# Altium PCB SCOPE.PcbDoc (part 1 of 4)
Units mil, origin at the board's own origin, x right, y up, seen from the top; angles counter-clockwise.
Board outline 7710 x 4000 mil, 2 copper layers (Top Layer, Bottom Layer); 219 components, 350 nets, 1637 pads, 359 vias.
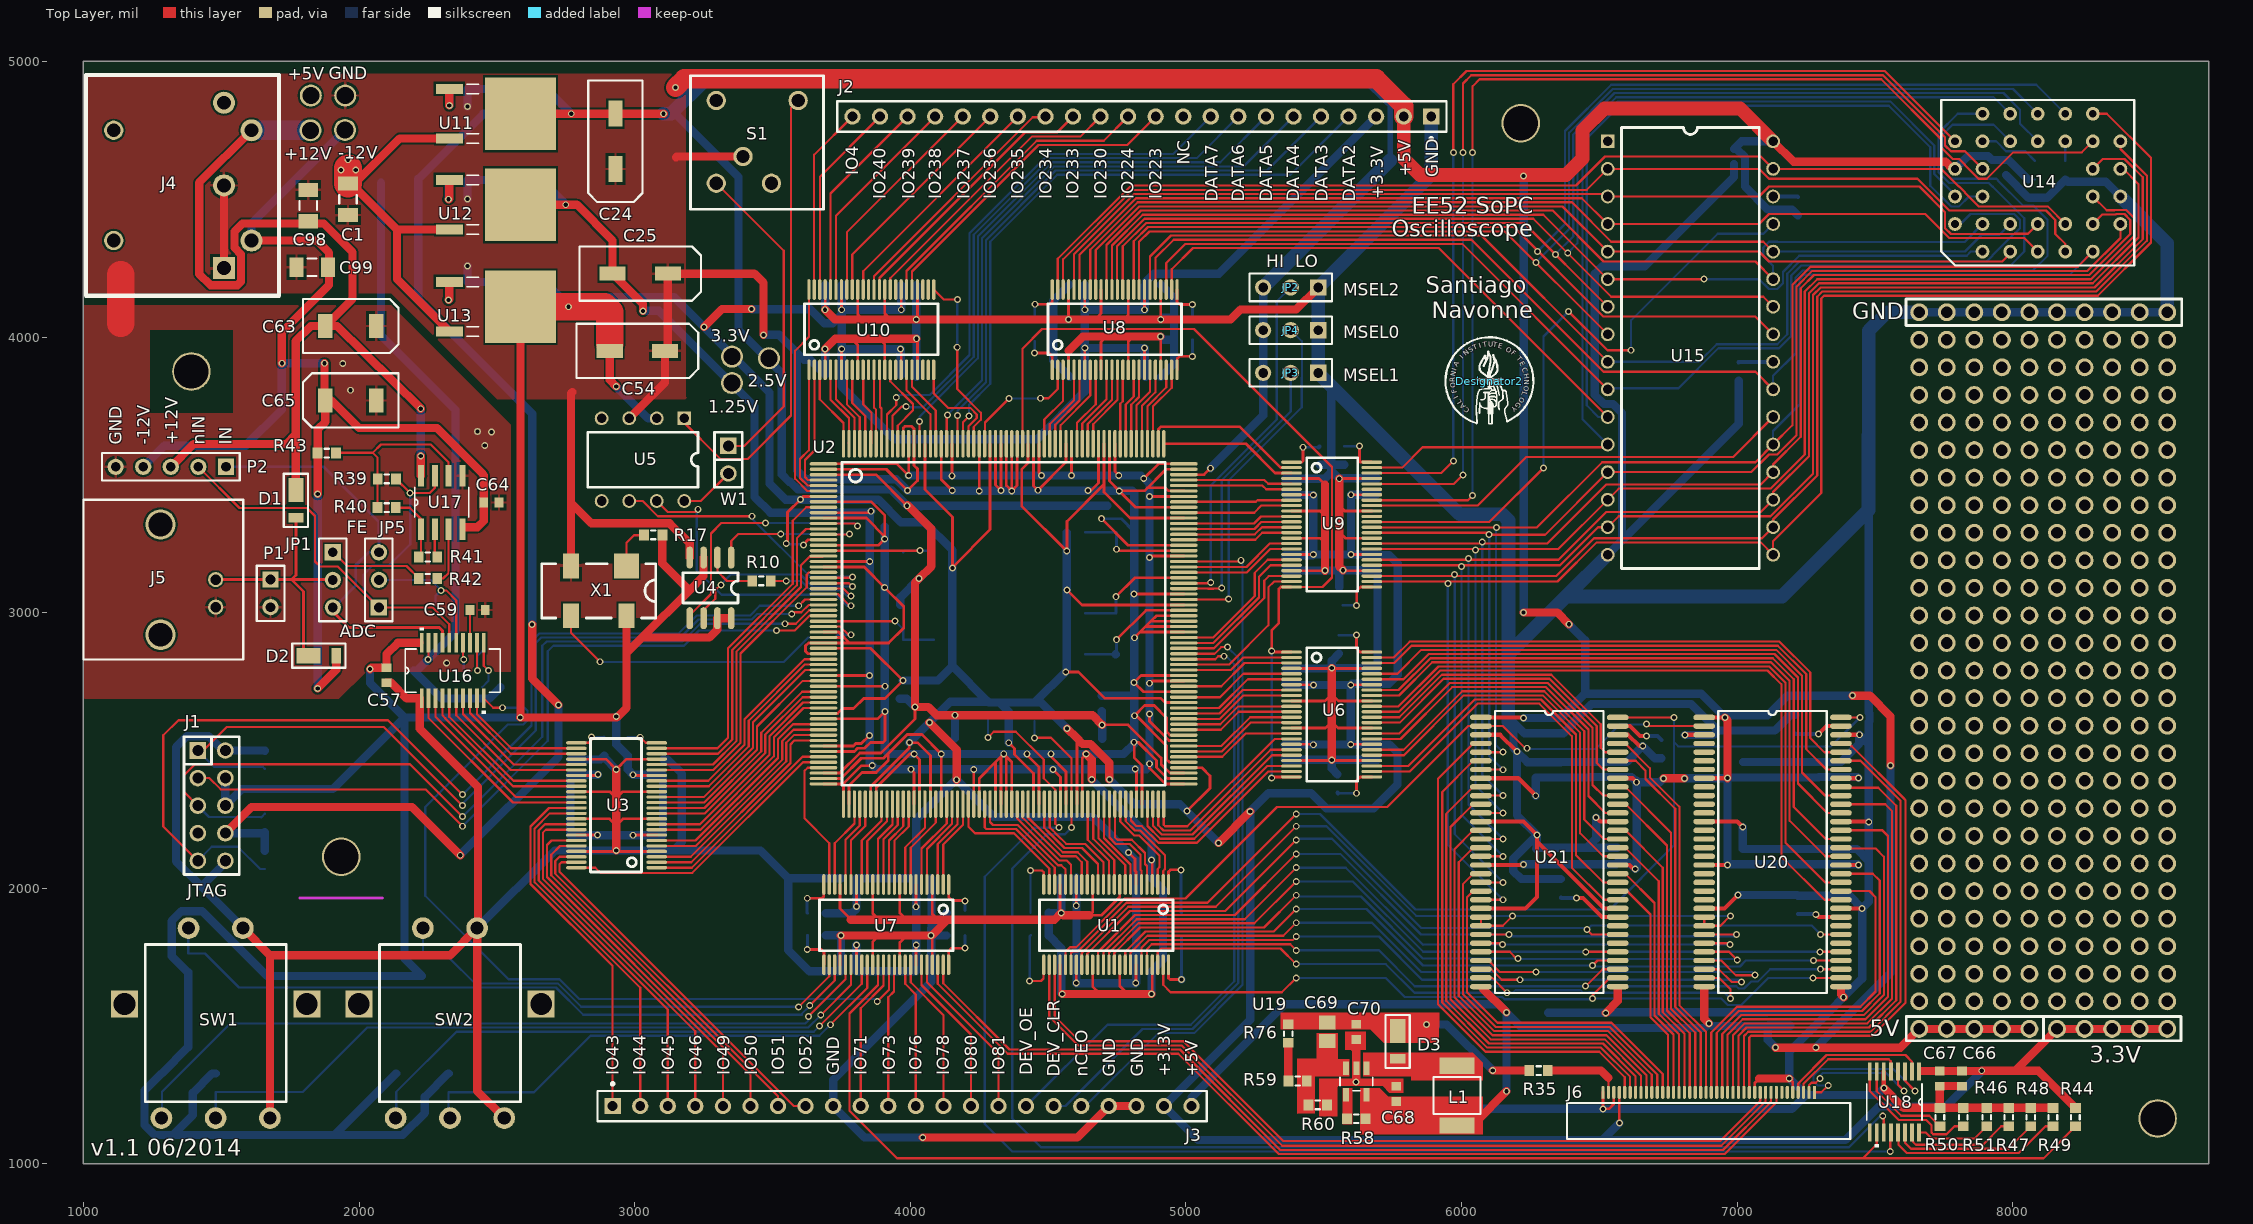
[diagram p0: Top Layer view]
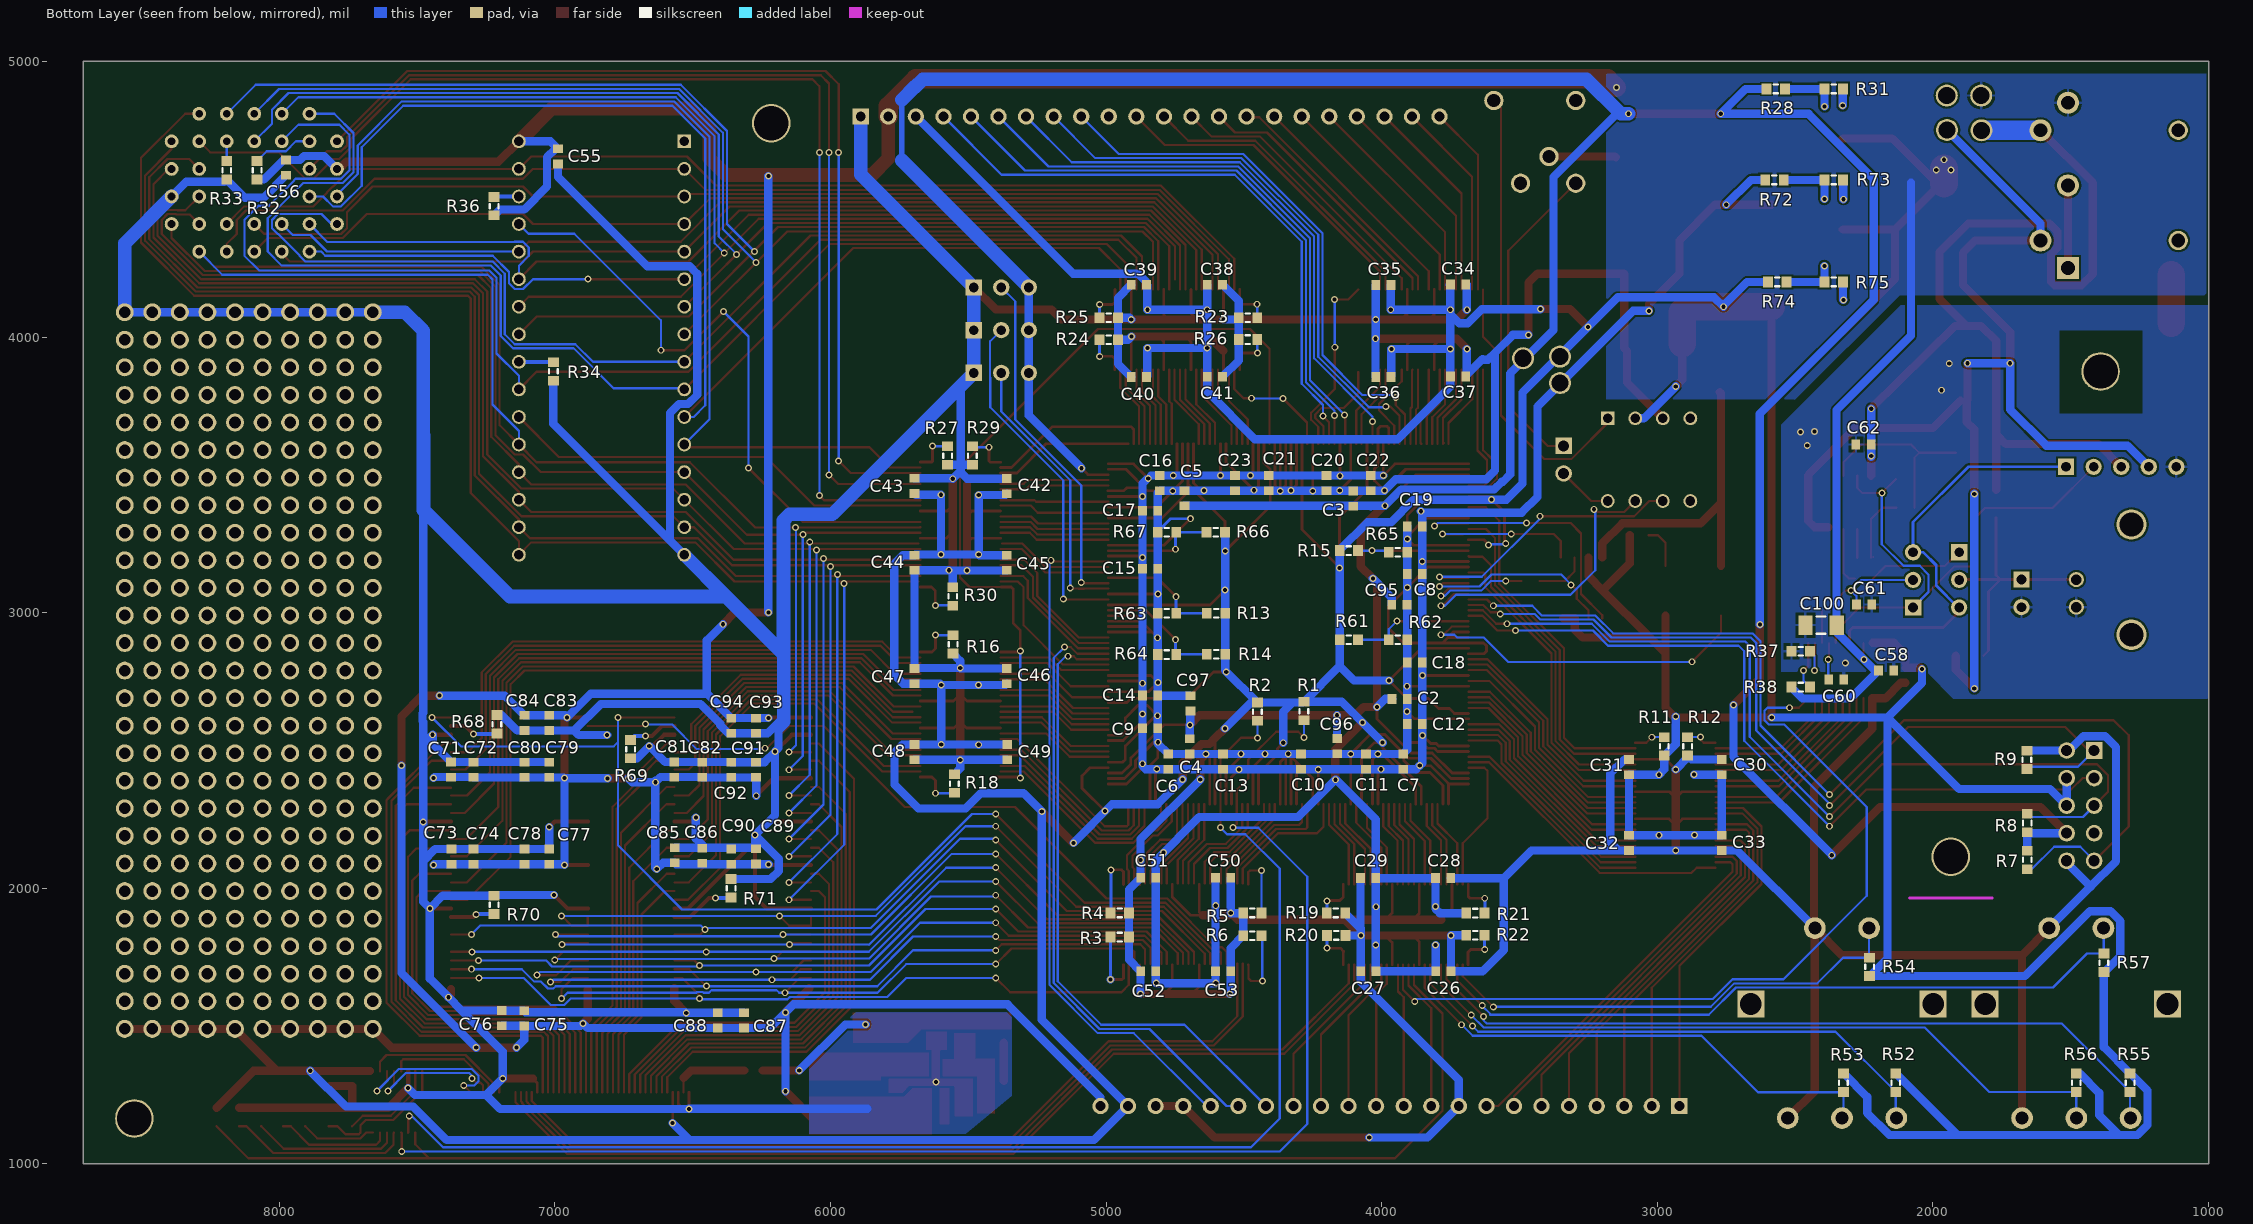
[diagram p1: Bottom Layer view, seen from below]

## Layer stack, top to bottom
Top Solder: solder mask 0.4, Solder Resist, Dk 3.5
Top Layer: signal copper 1.4
Dielectric 1: dielectric 12.6, FR-4, Dk 4.8
Bottom Layer: signal copper 1.4
Bottom Solder: solder mask 0.4, Solder Resist, Dk 3.5

## Board outline
1000,1000 8710,1000 8710,5000 1000,5000

## Design rules (kind name [scope] priority, off if disabled: settings)
Clearance [All] p1: gap=7
ComponentClearance [All] p1: gap=40 collisioncheckmode=3 verticalgap=0 showdistances=FALSE
HoleSize [All] p1: absolutevalues=TRUE maxlimit=150 minlimit=15 maxpercent=80.000 minpercent=20.000
MinimumAnnularRing [All] p1: minimumring=5
MinimumSolderMaskSliver [All] p1: minsoldermaskwidth=5
PolygonConnect polyvia [IsVia] p1: connectstyle=Direct reliefconductorwidth=10 reliefentries=4 polygonreliefangle="90 Angle" airgapwidth=10
PolygonConnect [All] p2: connectstyle=Relief reliefconductorwidth=10 reliefentries=4 polygonreliefangle="90 Angle" airgapwidth=10
RoutingVias [All] p1: holewidth=15 width=25 viastyle="Through Hole" minholewidth=15 minwidth=25 maxholewidth=15 maxwidth=25
SilkToSilkClearance [All] p1: silktosilkclearance=5
SilkToSolderMaskClearance [IsPad] p1: minsilkscreentomaskgap=5 clearancetoexposedcopper=TRUE
SolderMaskExpansion [All] p1: expansion=2.5
Width power [(InNet('PIN0') OR InNet('PIN3') OR InNet('PIN1') OR InNet('VCCINT'))] p1 off: maxlimit=100 minlimit=30 preferedwidth=30
Width [All] p2: maxlimit=100 minlimit=7 preferedwidth=10 minimp=50.000000 maximp=50.000000 favimp=50.000000
24 further rules are at their usual default settings.

## Classes and differential pairs
component class user_input: C66 C67 R44 R46 R47 R48 R49 R50 R51 R52 R53 R54 R55 R56 R57 SW1 SW2 U18
component class analog_frontend: C57 C58 C59 C60 C61 C62 C63 C64 C65 C100 D1 D2 J5 JP1 JP5 P1 P2 R37 R38 R39 R40 R41 R42 R43 U16 U17
component class sram_rom: C55 C56 R32 R33 R34 R36 U14 U15
component class fpga_sch: C1 C2 C3 C4 C5 C6 C7 C8 C9 C10 C11 C12 C13 C14 C15 C16 C17 C18 C19 C20 C21 C22 C23 C24 C25 C26 C27 C28 C29 C30 C31 C32 C33 C34 C35 C36 C37 C38 C39 C40 C41 C42 C43 C44 C45 C46 C47 C48 C49 C50 C51 C52 C53 C54 C95 C96 C97 C98 C99 J1 J2 J3 J4 JP2 JP3 JP4 R2 R3 R4 R5 R6 R7 R8 R9 R10 R11 R12 R13 R14 R15 R16 R17 R18 R19 R20 R21 R22 R23 R24 R25 R26 R27 R28 R29 R30 R31 R61 R62 R63 R64 R65 R66 R67 R72 R73 R74 R75 S1 U1 U2 U3 U4 U5 U6 U7 U8 U9 U10 U11 U12 U13 W1 X1
component class vram: C68 C69 C70 C71 C72 C73 C74 C75 C76 C77 C78 C79 C80 C81 C82 C83 C84 C85 C86 C87 C88 C89 C90 C91 C92 C93 C94 D3 J6 L1 R35 R58 R59 R60 R68 R69 R70 R71 R76 U19 U20 U21

## Components (designator, comment, footprint, x,y, rotation, side; value= is the part's Value field where it differs from the comment)
C1 "Cap Pol1" CAPC3216N 1960,4500 r270 top
C2 "Cap2" CAPC1608L#1 3935,2687 r180 bottom
C3 "Cap2" CAPC1608L#2 4103,3414 r270 bottom
C4 "Cap2" CAPC1608L#1 4696,2515 r270 bottom
C5 "Cap2" CAPC1608L#1 4715,3415 r90 bottom
C6 "Cap2" CAPC1608L#1 4774,2460 r90 bottom
C7 "Cap2" CAPC1608L#1 3922,2460 r90 bottom
C8 "Cap2" CAPC1608L#1 3880,3140 r0 bottom
C9 "Cap2" CAPC1608L#1 4840,2581 r180 bottom
C10 "Cap2" CAPC1608L#1 4293,2460 r90 bottom
C11 "Cap2" CAPC1608L#1 4057,2460 r90 bottom
C12 "Cap2" CAPC1608L#1 3880,2596 r0 bottom
C13 "Cap2" CAPC1608L#1 4576,2460 r90 bottom
C14 "Cap2" CAPC1608L#1 4840,2700 r180 bottom
C15 "Cap2" CAPC1608L#1 4840,3159 r180 bottom
C16 "Cap2" CAPC1608L#1 4805,3470 r270 bottom
C17 "Cap2" CAPC1608L#1 4840,3370 r180 bottom
C18 "Cap2" CAPC1608L#1 3880,2819 r0 bottom
C19 "Cap2" CAPC1608L#1 3880,3313 r0 bottom
C20 "Cap2" CAPC1608L#1 4200,3470 r270 bottom
C21 "Cap2" CAPC1608L#2 4410,3470 r90 bottom
C22 "Cap2" CAPC1608L#1 4040,3470 r270 bottom
C23 "Cap2" CAPC1608L#1 4532,3470 r270 bottom
C24 "Cap Pol3" C2917 2930,4710 r270 top
C25 "Cap Pol3" C2917 3020,4230 r0 top
C26 "Cap2" CAPC1608L#2 3776,1699 r0 bottom
C27 "Cap2" CAPC1608L#1 4048,1699 r0 bottom
C28 "Cap2" CAPC1608L#1 3777,2037 r180 bottom
C29 "Cap2" CAPC1608L#1 4049,2037 r0 bottom
C30 "Cap2" CAPC1608L#1 2766,2440 r90 bottom
C31 "Cap2" CAPC1608L#1 3103,2440 r90 bottom
C32 "Cap2" CAPC1608L#1 3103,2165 r270 bottom
C33 "Cap2" CAPC1608L#1 2766,2165 r270 bottom
C34 "Cap2" CAPC1608L#1 3723,4191 r180 bottom
C35 "Cap2" CAPC1608L#1 3994,4189 r0 bottom
C36 "Cap2" CAPC1608L#1 3994,3855 r0 bottom
C37 "Cap2" CAPC1608L#1 3723,3857 r180 bottom
C38 "Cap2" CAPC1608L#1 4605,4190 r180 bottom
C39 "Cap2" CAPC1608L#1 4881,4190 r0 bottom
C40 "Cap2" CAPC1608L#1 4881,3855 r0 bottom
C41 "Cap2" CAPC1608L#1 4605,3856 r180 bottom
C42 "Cap2" CAPC1608L#1 5360,3459 r90 bottom
C43 "Cap2" CAPC1608L#1 5695,3460 r90 bottom
C44 "Cap2" CAPC1608L#1 5695,3181 r270 bottom
C45 "Cap2" CAPC1608L#1 5360,3181 r270 bottom
C46 "Cap2" CAPC1608L#1 5360,2770 r90 bottom
C47 "Cap2" CAPC1608L#1 5695,2770 r90 bottom
C48 "Cap2" CAPC1608L#1 5695,2494 r270 bottom
C49 "Cap2" CAPC1608L#1 5358,2494 r270 bottom
C50 "Cap2" CAPC1608L#1 4575,2038 r180 bottom
C51 "Cap2" CAPC1608L#1 4847,2038 r0 bottom
C52 "Cap2" CAPC1608L#1 4847,1699 r0 bottom
C53 "Cap2" CAPC1608L#1 4575,1699 r180 bottom
C54 "Cap Pol3" C2917 3010,3950 r0 top
C55 "Cap2" CAPC1608L#1 6988,4655 r270 bottom
C56 "Cap2" CAPC1608L#1 7975,4615 r270 bottom
C57 "Cap2" CAPC1608L#1 2100,2773 r270 top
C58 "Cap2" CAPC1608L#1 2170,2790 r180 bottom
C59 "Cap2" CAPC1608L#1 2430,3010 r0 top
C60 "Cap2" CAPC1608L#1 2351,2758 r180 bottom
C61 "Cap2" CAPC1608L#1 2250,3030 r180 bottom
C62 "Cap2" CAPC1608L#1 2252,3610 r0 bottom
C63 "Cap Pol3" C2413 1970,4040 r0 top
C64 "Cap2" CAPC1608L#1 2480,3400 r180 top
C65 "Cap Pol3" C2413 1970,3770 r180 top
C66 "Cap2" CAPC1608L#1 7815,1310 r270 top
C67 "Cap2" CAPC1608L#1 7735,1310 r270 top
C68 "Cap2" CAPC1608L#1 5763,1254 r90 top
C69 "Cap2" CAPC2012N 5513,1480 r90 top
C70 "Cap2" CAPC1608L#1 5618,1479 r270 top
C71 "Cap2" CAPC1608L#1 7376.06,2431.02 r90 bottom
C72 "Cap2" CAPC1608L#1 7295,2430 r90 bottom
C73 "Cap2" CAPC1608L#1 7375,2115 r90 bottom
C74 "Cap2" CAPC1608L#1 7295,2115 r90 bottom
C75 "Cap2" CAPC1608L#1 7111,1528 r90 bottom
C76 "Cap2" CAPC1608L#1 7192,1529 r90 bottom
C77 "Cap2" CAPC1608L#1 7020,2115 r90 bottom
C78 "Cap2" CAPC1608L#1 7110,2115 r90 bottom
C79 "Cap2" CAPC1608L#1 7020,2430 r90 bottom
C80 "Cap2" CAPC1608L#1 7110,2430 r90 bottom
C81 "Cap2" CAPC1608L#1 6566.06,2431.02 r90 bottom
C82 "Cap2" CAPC1608L#1 6465,2430 r90 bottom
C83 "Cap2" CAPC1608L#1 7020,2600 r270 bottom
C84 "Cap2" CAPC1608L#1 7110,2600 r270 bottom
C85 "Cap2" CAPC1608L#1 6565,2120 r90 bottom
C86 "Cap2" CAPC1608L#1 6465,2118 r90 bottom
C87 "Cap2" CAPC1608L#1 6313,1521 r90 bottom
C88 "Cap2" CAPC1608L#1 6409,1521 r90 bottom
C89 "Cap2" CAPC1608L#1 6270,2116 r90 bottom
C90 "Cap2" CAPC1608L#1 6360,2115 r90 bottom
C91 "Cap2" CAPC1608L#1 6270,2430 r90 bottom
C92 "Cap2" CAPC1608L#1 6360,2430 r90 bottom
C93 "Cap2" CAPC1608L#1 6270,2590 r270 bottom
C94 "Cap2" CAPC1608L#1 6360,2590 r270 bottom
C95 "Cap2" CAPC1608L#1 3936,3029 r180 bottom
C96 "Cap2" CAPC1608L#1 4161,2516 r270 bottom
C97 "Cap2" CAPC1608L#1 4694,2671 r90 bottom
C98 "Cap Pol1" CAPC3216N 1816,4477 r90 top
C99 "Cap Pol1" CAPC3216N 1830,4253 r0 top
C100 "Cap Pol3" CAPC3216N 2406,2955 r0 bottom
D1 "D Schottky" POWERDI123 1771,3395 r90 top
D2 "D Schottky" POWERDI123 1867,2844 r180 top
D3 "D Schottky" POWERDI123 5768,1432 r90 top
Designator2 "Comment" CITLOGO 6101,3840 r0 top
J1 "JTAG" SIP2X5 1415,2500 r270 top
J2 "Edge Con 22" PIN22 5890,4800 r180 top
J3 "Edge Con 22" PIN22 2920,1210 r0 top
J4 "PS_CONN" DIN5 1710,4150 r180 top
J5 "BNC" AMP31-5540 1480,3120 r270 top
J6 "A100287CT" FPC40 7280,1260 r270 top
JP1 "AIN" HDR1X3 1905,3219 r270 top
JP2 "MSEL2" HDR1X3 5480,4180 r180 top
JP3 "MSEL1" HDR1X3 5480,3870 r180 top
JP4 "MSEL0" HDR1X3 5480,4025 r180 top
JP5 "AIN" HDR1X3 2072,3019 r90 top
L1 "Inductor" lsdr0703 5983,1248 r90 top
P1 "Header 2" HDR1X2 1679,3120 r270 top
P2 "Header 5" HDR1X5 1517,3529 r180 top
R1 "Res3" RESC1608N 4282,2643 r270 bottom
R2 "Res3" RESC1608N 4451,2641 r270 bottom
R3 "Res3" RESC1608N 4950,1911 r180 bottom
R4 "Res3" RESC1608N 4950,1823 r180 bottom
R5 "Res3" RESC1608N 4469,1911 r0 bottom
R6 "Res3" RESC1608N 4469,1828 r0 bottom
R7 "Res3" RESC1608N 1658,2103 r270 bottom
R8 "Res3" RESC1608N 1658,2237 r90 bottom
R9 "Res3" RESC1608N 1659,2466 r270 bottom
R10 "Res3" RESC1608N 3460,3115 r0 top
R11 "Res3" RESC1608N 2975,2515 r270 bottom
R12 "Res3" RESC1608N 2890,2515 r270 bottom
R13 "Res3" RESC1608N 4601,2998 r0 bottom
R14 "Res3" RESC1608N 4601,2849 r0 bottom
R15 "Res3" RESC1608N 4119,3225 r180 bottom
R16 "Res3" RESC1608N 5555,2885 r90 bottom
R17 "Res3" RESC1608N 3067,3282 r0 top
R18 "Res3" RESC1608N 5550,2380 r270 bottom
R19 "Res3" RESC1608N 4166,1911 r180 bottom
R20 "Res3" RESC1608N 4165,1829 r180 bottom
R21 "Res3" RESC1608N 3660,1910 r0 bottom
R22 "Res3" RESC1608N 3660,1830 r0 bottom
R23 "Res3" RESC1608N 4485,4070 r0 bottom
R24 "Res3" RESC1608N 4990,3990 r180 bottom
R25 "Res3" RESC1608N 4990,4070 r180 bottom
R26 "Res3" RESC1608N 4485,3991 r0 bottom
R27 "Res3" RESC1608N 5575,3570 r270 bottom
R28 "Res3" RESC1608N 2570,4900 r180 bottom
R29 "Res3" RESC1608N 5485,3570 r270 bottom
R30 "Res3" RESC1608N 5556,3059 r90 bottom
R31 "Res3" RESC1608N 2360,4900 r180 bottom
R32 "Res3" RESC1608N 8080,4605 r90 bottom
R33 "Res3" RESC1608N 8190,4605 r90 bottom
R34 "Res3" RESC1608N 7005,3875 r90 bottom
R35 "Res3" RESC1608N 6279,1339 r180 top
R36 "Res3" RESC1608N 7220,4475 r90 bottom
R37 "Res3" RESC1608N 2480,2860 r180 bottom
R38 "Res3" RESC1608N 2480,2730 r180 bottom
R39 "Res3" RESC1608N 2101,3485 r0 top
R40 "Res3" RESC1608N 2100,3381 r0 top
R41 "Res3" RESC1608N 2250,3202 r0 top
R42 "Res3" RESC1608N 2250,3124 r180 top
R43 "Res3" RESC1608N 1883,3579 r0 top
R44 "Res3" RESC1608N 8227,1170 r270 top
R46 "Res3" RESC1608N 7905,1170 r270 top
R47 "Res3" RESC1608N 7985,1170 r270 top
R48 "Res3" RESC1608N 8065,1170 r270 top
R49 "Res3" RESC1608N 8145,1170 r270 top
R50 "Res3" RESC1608N 7735,1170 r90 top
R51 "Res3" RESC1608N 7820,1170 r90 top
R52 "Res3" RESC1608N 2135,1295 r270 bottom
R53 "Res3" RESC1608N 2325,1295 r270 bottom
R54 "Res3" RESC1608N 2230,1715 r90 bottom
R55 "Res3" RESC1608N 1285,1295 r270 bottom
R56 "Res3" RESC1608N 1480,1295 r270 bottom
R57 "Res3" RESC1608N 1380,1730 r90 bottom
R58 "Res3" RESC1608N 5618,1164 r180 top
R59 "Res3" RESC1608N 5405,1301 r180 top
R60 "Res3" RESC1608N 5478,1214 r180 top
R61 "Res3" RESC1608N 4119,2902 r180 bottom
R62 "Res3" RESC1608N 3941,2902 r0 bottom
R63 "Res3" RESC1608N 4779,2998 r180 bottom
R64 "Res3" RESC1608N 4779,2848 r180 bottom
R65 "Res3" RESC1608N 3941,3219 r0 bottom
R66 "Res3" RESC1608N 4602,3292 r0 bottom
R67 "Res3" RESC1608N 4779,3292 r180 bottom
R68 "Res3" RESC1608N 7210,2595 r270 bottom
R69 "Res3" RESC1608N 6725,2505 r90 bottom
R70 "Res3" RESC1608N 7220,1940 r90 bottom
R71 "Res3" RESC1608N 6360,2000 r90 bottom
R72 "Res3" RESC1608N 2575,4570 r180 bottom
R73 "Res3" RESC1608N 2360,4570 r180 bottom
R74 "Res3" RESC1608N 2565,4200 r180 bottom
R75 "Res3" RESC1608N 2360,4200 r180 bottom
R76 "Res3" RESC1608N 5371,1473 r90 top
S1 "SW-SPDT" SPDT 3596,5645 r90 top
SW1 "SW-ROTARY&PB" PEC16-4XXXF-SXXXX 1480,1580 r0 top
SW2 "SW-ROTARY&PB" PEC16-4XXXF-SXXXX 2330,1580 r0 top
U1 "74LVT16245" TSSOP48 4937,2014 r180 top
U2 "EP3C25Q240" PQFP240 3685,3540 r0 top
U3 "74LVT16245" TSSOP48 3080,2075 r90 top
U4 "EPCS16" SO-8 3350,3200 r270 top
U5 "MAX706AS" DIP8 3180,3705 r270 top
U6 "74LVT16245" TSSOP48 5383,2857 r270 top
U7 "74LVT16245" TSSOP48 4139,2014 r180 top
U8 "74LVT16245" TSSOP48 4515,3881 r0 top
U9 "74LVT16245" TSSOP48 5383,3546 r270 top
U10 "74LVT16245" TSSOP48 3632,3881 r0 top
U11 "TLV1117-25" KVU3 2580,4810 r270 top
U12 "TLV1117-ADJ" KVU3 2580,4480 r270 top
U13 "TLV1117-33" KVU3 2580,4110 r270 top
U14 "AM29F040B" PLCCS32 7790,4210 r90 top
U15 "HM628128B" DIP32 6530,4710 r0 top
U16 "ADS830" DBQ20 2340,2790 r90 top
U17 "THS4042" D8 2300,3400 r90 top
U18 "TSC2003" PW16 7570,1225 r270 top
U19 "LMR62014" MF05A 5618,1299 r270 top
U20 "MSM5416283" SSOP64 6880,2620 r0 top
U21 "MSM5416283" SSOP64 6070,2620 r0 top
W1 "Jumper" SIP2 3340,3605 r270 top
X1 "OSCOE" SG636PCE 2970,3170 r180 top

## Footprints (in the part's own frame and the unit in brackets; to place one, negate y for a bottom-side part, rotate by r counter-clockwise, add the part's x,y. Pads: shape width x height; smd on the part's side, far side on the other; paste and mask are expansions set on the pad)
AMP31-5540 [mil]
  round 55 hole 38: 1(0,0) 2(100,0)
  round 110 hole 86: ""(-200,-200) ""(200,-200)
  silkscreen extent -290,-480 290,100
C2413 [mm]
  rect 1.3x2.2 smd: 1(-2.35,0) 2(2.35,0)
  silkscreen extent -4.4,-2.5 4.4,2.5
C2917 [mm]
  rect 2.4x1.3 smd: 1(-2.55,0) 2(2.55,0)
  silkscreen extent -5.6,-2.5 5.6,2.5
CAPC1608L#1 [mm] "Chip Capacitor, Body 1.6x0.8mm, IPC High Density"
  rect 0.8x0.9 smd: 1(-0.7,0) 2(0.7,0)
  body extent -0.87,-0.48 0.87,0.48, height 0.85
CAPC1608L#2 [mm] "Chip Capacitor, Body 1.6x0.8mm, IPC High Density"
  rect 0.8x0.9 smd: 1(0.7,0) 2(-0.7,0)
  body extent -0.87,-0.48 0.87,0.48, height 0.85
CAPC2012N [mm] "Chip Capacitor, Body 2.0x1.3mm, IPC Medium Density"
  rect 1.3x1.5 smd: 1(-0.85,0) 2(0.85,0)
  body extent -1.1,-0.72 1.1,0.72, height 1.1
CAPC3216N [mm] "Chip Capacitor, Body 3.2x1.6mm, IPC Medium Density"
  rect 1.3x1.8 smd: 1(-1.45,0) 2(1.45,0)
  silkscreen extent -0.4,-0.8 0.4,0.8, body extent -1.7,-0.9 1.7,0.9, height 1.35
CITLOGO [mil]
  silkscreen extent -159,-154 159,159
D8 [mil]
  rect 78x22 smd: 1(-97,75) 2(-97,25) 3(-97,-25) 4(-97,-75) 5(97,-75) 6(97,-25) 7(97,25) 8(97,75)
  silkscreen extent -54,-98 54,98
DBQ20 [mil]
  rect 71x14 smd: 1(-100.5,112.5) 2(-100.5,87.5) 3(-100.5,62.5) 4(-100.5,37.5) 5(-100.5,12.5) 6(-100.5,-12.5) 7(-100.5,-37.5) 8(-100.5,-62.5) 9(-100.5,-87.5) 10(-100.5,-112.5) 11(100.5,-112.5) 12(100.5,-87.5) 13(100.5,-62.5) 14(100.5,-37.5) 15(100.5,-12.5) 16(100.5,12.5) 17(100.5,37.5) 18(100.5,62.5) 19(100.5,87.5) 20(100.5,112.5)
  silkscreen extent -156,-172 156,172
DIN5 [mil]
  rect 80x80 hole 50: 1(200,-100)
  round 80 hole 50: 2(100,-200) 3(200,-400) 4(100,-600) 5(200,-700)
  round 70 hole 50: ""(600,-200) ""(600,-600)
  silkscreen extent 0,-800 700,0
DIP8 [mil]
  rect 50x50 hole 35: 1(0,0)
  round 50 hole 35: 2(0,-100) 3(0,-200) 4(0,-300) 5(300,-300) 6(300,-200) 7(300,-100) 8(300,0)
  silkscreen extent 50,-350 250,50
DIP32 [mil]
  rect 50x50 hole 35: 1(0,0)
  round 50 hole 35: 2(0,-100) 3(0,-200) 4(0,-300) 5(0,-400) 6(0,-500) 7(0,-600) 8(0,-700) 9(0,-800) 10(0,-900) 11(0,-1000) 12(0,-1100) 13(0,-1200) 14(0,-1300) 15(0,-1400) 16(0,-1500) 17(600,-1500) 18(600,-1400) 19(600,-1300) 20(600,-1200) 21(600,-1100) 22(600,-1000) 23(600,-900) 24(600,-800) 25(600,-700) 26(600,-600) 27(600,-500) 28(600,-400) 29(600,-300) 30(600,-200) 31(600,-100) 32(600,0)
  silkscreen extent 50,-1550 550,50
FPC40 [mm]
  oval 1.2x0.3 smd: 1(0,-19.482) 2(0,-18.982) 3(0,-18.482) 4(0,-17.982) 5(0,-17.482) 6(0,-16.982) 7(0,-16.482) 8(0,-15.982) 9(0,-15.482) 10(0,-14.982) 11(0,-14.482) 12(0,-13.982) 13(0,-13.482) 14(0,-12.982) 15(0,-12.482) 16(0,-11.982) 17(0,-11.482) 18(0,-10.982) 19(0,-10.482) 20(0,-9.982) 21(0,-9.5) 22(0,-9) 23(0,-8.5) 24(0,-8) 25(0,-7.5) 26(0,-7) 27(0,-6.5) 28(0,-6) 29(0,-5.5) 30(0,-5) 31(0,-4.5) 32(0,-4) 33(0,-3.5) 34(0,-3) 35(0,-2.5) 36(0,-2) 37(0,-1.5) 38(0,-1) 39(0,-0.5)
  rect 1.2x0.3 smd: 40(0,0)
  silkscreen extent 1,-22.8 4.3,3.3
HDR1X2 [mm] "Connector; Header; 2 Position"
  rect 1.5x1.5 hole 0.9: 1(0,0)
  round 1.5 hole 0.9: 2(2.54,0)
  silkscreen extent -1.27,-1.27 3.81,1.27
HDR1X3 [mm]
  rect 1.5x1.5 hole 0.9: 1(0,0)
  round 1.5 hole 0.9: 2(2.54,0) 3(5.08,0)
  silkscreen extent -1.27,-1.27 6.35,1.27
HDR1X5 [mm] "Connector; Header; 5 Position"
  rect 1.5x1.5 hole 0.9: 1(0,0)
  round 1.5 hole 0.9: 2(2.54,0) 3(5.08,0) 4(7.62,0) 5(10.16,0)
  silkscreen extent -1.27,-1.27 11.43,1.27
KVU3 [mil]
  rect 37x98 smd: 1(-90,-252.5) 3(90,-252.5)
  rect 264x257 smd: 2(0,6)
  silkscreen extent -107,-190 108,-146
lsdr0703 [mm]
  rect 1.5x3.2 smd: 1(-2.75,0) 2(2.75,0)
  silkscreen extent -1.7,-2.16 1.73,2.16
MF05A [mil]
  rect 50x22 smd: 1(-48,37.5) 2(-48,0) 3(-48,-37.5) 4(48,-37.5) 5(48,37.5)
  silkscreen extent -15,-59 33,59
PEC16-4XXXF-SXXXX [mm]
  round 2 hole 1.2: 1(-5,-10.5) 2(5,-10.5) 3(0,-10.5) 4(-2.5,7) 5(2.5,7)
  rect 2.5x2.5 hole 2: 6(-8.4,0) 7(8.4,0)
  silkscreen extent -6.5,-9 6.5,5.5
PIN22 [mm] "Connector; Edge; 22 Position"
  rect 1.5x1.5 hole 0.9: 1(0,0)
  round 1.5 hole 0.9: 2(2.54,0) 3(5.08,0) 4(7.62,0) 5(10.16,0) 6(12.7,0) 7(15.24,0) 8(17.78,0) 10(22.86,0) 11(25.4,0) 12(27.94,0) 13(30.48,0) 14(33.02,0) 15(35.56,0) 16(38.1,0) 17(40.64,0) 18(43.18,0) 19(45.72,0) 20(48.26,0) 21(50.8,0) 22(53.34,0)
  oval 1.51x1.5 hole 0.9: 9(20.32,0)
  silkscreen extent -1.4,-1.4 54.74,2.17
PLCCS32 [mil]
  round 50 hole 28: 1(400,-100) 2(300,0) 3(300,-100) 4(200,0) 5(100,-100) 6(200,-100) 7(100,-200) 8(200,-200) 9(100,-300) 10(200,-300) 11(100,-400) 12(200,-400) 13(100,-500) 14(200,-600) 15(200,-500) 16(300,-600) 17(300,-500) 18(400,-600) 19(400,-500) 20(500,-600) 21(600,-500) 22(500,-500) 23(600,-400) 24(500,-400) 25(600,-300) 26(500,-300) 27(600,-200) 28(500,-200) 29(600,-100) 30(500,0) 31(500,-100) 32(400,0)
  silkscreen extent 50,-650 650,50
POWERDI123 [mm]
  rect 0.9x1.4 smd: A(-1.275,0)
  rect 2.2x1.4 smd: K(1.275,0)
  silkscreen extent -2.13,-1.12 2.77,1.12
PQFP240 [mm]
  oval 2.54x0.3 smd: 1(0,0) 2(0,-0.5) 3(0,-1) 4(0,-1.5) 5(0,-2) 6(0,-2.5) 7(0,-3) 8(0,-3.5) 9(0,-4) 10(0,-4.5) 11(0,-5) 12(0,-5.5) 13(0,-6) 14(0,-6.5) 15(0,-7) 16(0,-7.5) 17(0,-8) 18(0,-8.5) 19(0,-9) 20(0,-9.5) 21(0,-10) 22(0,-10.5) 23(0,-11) 24(0,-11.5) 25(0,-12) 26(0,-12.5) 27(0,-13) 28(0,-13.5) 29(0,-14) 30(0,-14.5) 31(0,-15) 32(0,-15.5) 33(0,-16) 34(0,-16.5) 35(0,-17) 36(0,-17.5) 37(0,-18) 38(0,-18.5) 39(0,-19) 40(0,-19.5) 41(0,-20) 42(0,-20.5) 43(0,-21) 44(0,-21.5) 45(0,-22) 46(0,-22.5) 47(0,-23) 48(0,-23.5) 49(0,-24) 50(0,-24.5) 51(0,-25) 52(0,-25.5) 53(0,-26) 54(0,-26.5) 55(0,-27) 56(0,-27.5) 57(0,-28) 58(0,-28.5) 59(0,-29) 60(0,-29.5) 121(33.2,-29.5) 122(33.2,-29) 123(33.2,-28.5) 124(33.2,-28) 125(33.2,-27.5) 126(33.2,-27) 127(33.2,-26.5) 128(33.2,-26) 129(33.2,-25.5) 130(33.2,-25) 131(33.2,-24.5) 132(33.2,-24) 133(33.2,-23.5) 134(33.2,-23) 135(33.2,-22.5) 136(33.2,-22) 137(33.2,-21.5) 138(33.2,-21) 139(33.2,-20.5) 140(33.2,-20) 141(33.2,-19.5) 142(33.2,-19) 143(33.2,-18.5) 144(33.2,-18) 145(33.2,-17.5) 146(33.2,-17) 147(33.2,-16.5) 148(33.2,-16) 149(33.2,-15.5) 150(33.2,-15) 151(33.2,-14.5) 152(33.2,-14) 153(33.2,-13.5) 154(33.2,-13) 155(33.2,-12.5) 156(33.2,-12) 157(33.2,-11.5) 158(33.2,-11) 159(33.2,-10.5) 160(33.2,-10) 161(33.2,-9.5) 162(33.2,-9) 163(33.2,-8.5) 164(33.2,-8) 165(33.2,-7.5) 166(33.2,-7) 167(33.2,-6.5) 168(33.2,-6) 169(33.2,-5.5) 170(33.2,-5) 171(33.2,-4.5) 172(33.2,-4) 173(33.2,-3.5) 174(33.2,-3) 175(33.2,-2.5) 176(33.2,-2) 177(33.2,-1.5) 178(33.2,-1) 179(33.2,-0.5) 180(33.2,0)
  oval 0.3x2.54 smd: 61(1.85,-31.35) 62(2.35,-31.35) 63(2.85,-31.35) 64(3.35,-31.35) 65(3.85,-31.35) 66(4.35,-31.35) 67(4.85,-31.35) 68(5.35,-31.35) 69(5.85,-31.35) 70(6.35,-31.35) 71(6.85,-31.35) 72(7.35,-31.35) 73(7.85,-31.35) 74(8.35,-31.35) 75(8.85,-31.35) 76(9.35,-31.35) 77(9.85,-31.35) 78(10.35,-31.35) 79(10.85,-31.35) 80(11.35,-31.35) 81(11.85,-31.35) 82(12.35,-31.35) 83(12.85,-31.35) 84(13.35,-31.35) 85(13.85,-31.35) 86(14.35,-31.35) 87(14.85,-31.35) 88(15.35,-31.35) 89(15.85,-31.35) 90(16.35,-31.35) 91(16.85,-31.35) 92(17.35,-31.35) 93(17.85,-31.35) 94(18.35,-31.35) 95(18.85,-31.35) 96(19.35,-31.35) 97(19.85,-31.35) 98(20.35,-31.35) 99(20.85,-31.35) 100(21.35,-31.35) 101(21.85,-31.35) 102(22.35,-31.35) 103(22.85,-31.35) 104(23.35,-31.35) 105(23.85,-31.35) 106(24.35,-31.35) 107(24.85,-31.35) 108(25.35,-31.35) 109(25.85,-31.35) 110(26.35,-31.35) 111(26.85,-31.35) 112(27.35,-31.35) 113(27.85,-31.35) 114(28.35,-31.35) 115(28.85,-31.35) 116(29.35,-31.35) 117(29.85,-31.35) 118(30.35,-31.35) 119(30.85,-31.35) 120(31.35,-31.35) 181(31.35,1.85) 182(30.85,1.85) 183(30.35,1.85) 184(29.85,1.85) 185(29.35,1.85) 186(28.85,1.85) 187(28.35,1.85) 188(27.85,1.85) 189(27.35,1.85) 190(26.85,1.85) 191(26.35,1.85) 192(25.85,1.85) 193(25.35,1.85) 194(24.85,1.85) 195(24.35,1.85) 196(23.85,1.85) 197(23.35,1.85) 198(22.85,1.85) 199(22.35,1.85) 200(21.85,1.85) 201(21.35,1.85) 202(20.85,1.85) 203(20.35,1.85) 204(19.85,1.85) 205(19.35,1.85) 206(18.85,1.85) 207(18.35,1.85) 208(17.85,1.85) 209(17.35,1.85) 210(16.85,1.85) 211(16.35,1.85) 212(15.85,1.85) 213(15.35,1.85) 214(14.85,1.85) 215(14.35,1.85) 216(13.85,1.85) 217(13.35,1.85) 218(12.85,1.85) 219(12.35,1.85) 220(11.85,1.85) 221(11.35,1.85) 222(10.85,1.85) 223(10.35,1.85) 224(9.85,1.85) 225(9.35,1.85) 226(8.85,1.85) 227(8.35,1.85) 228(7.85,1.85) 229(7.35,1.85) 230(6.85,1.85) 231(6.35,1.85) 232(5.85,1.85) 233(5.35,1.85) 234(4.85,1.85) 235(4.35,1.85) 236(3.85,1.85) 237(3.35,1.85) 238(2.85,1.85) 239(2.35,1.85) 240(1.85,1.85)
  silkscreen extent 1.7,-29.62 31.5,0.15
PW16 [mil]
  rect 66x14 smd: 1(-111,89.57) 2(-111,63.98) 3(-111,38.39) 4(-111,12.8) 5(-111,-12.8) 6(-111,-38.39) 7(-111,-63.98) 8(-111,-89.57) 9(111,-89.57) 10(111,-63.98) 11(111,-38.39) 12(111,-12.8) 13(111,12.8) 14(111,38.39) 15(111,63.98) 16(111,89.57)
  silkscreen extent -66,-101 164,101
RESC1608N [mm] "Chip Resistor, Body 1.6x0.8mm, IPC Medium Density"
  rect 0.9x1 smd: 1(-0.85,0) 2(0.85,0)
  silkscreen extent -0.2,-0.4 0.2,0.4, body extent -0.85,-0.48 0.85,0.48, height 0.6
SG636PCE [mm]
  rect 2.3x2.3 smd: 1(0,0)
  rect 1.5x2.3 smd: 2(5.1,0) 3(5.1,4.6) 4(0,4.6)
  silkscreen extent -2.7,-0.2 7.8,4.8
SIP2 [mil]
  rect 60x60 hole 40: 1(0,0)
  round 60 hole 40: 2(100,0)
  silkscreen extent -50,-50 150,50
SIP2X5 [mil]
  rect 60x60 hole 40: 1(0,0)
  round 60 hole 40: 2(0,100) 3(100,0) 4(100,100) 5(200,0) 6(200,100) 7(300,0) 8(300,100) 9(400,0) 10(400,100)
  silkscreen extent -50,-50 450,150
SO-8 [mil]
  oval 80x24 smd: 1(0,0) 2(0,-50) 3(0,-100) 4(0,-150) 5(220,-150) 6(220,-100) 7(220,-50) 8(220,0)
  silkscreen extent 55,-175 165,25
SPDT [mil] "SPDT Switch"
  round 70 hole 48: 0(-787,300) 1(-787,3) 2(-1087,100) 3(-990,203) 4(-1087,300)
  silkscreen extent -1181,-89 -697,394
SSOP64 [mm]
  oval 2x0.5 smd: 1(0,0) 2(0,-0.8) 3(0,-1.6) 4(0,-2.4) 5(0,-3.2) 6(0,-4) 7(0,-4.8) 8(0,-5.6) 9(0,-6.4) 10(0,-7.2) 11(0,-8) 12(0,-8.8) 13(0,-9.6) 14(0,-10.4) 15(0,-11.2) 16(0,-12) 17(0,-12.8) 18(0,-13.6) 19(0,-14.4) 20(0,-15.2) 21(0,-16) 22(0,-16.8) 23(0,-17.6) 24(0,-18.4) 25(0,-19.2) 26(0,-20) 27(0,-20.8) 28(0,-21.6) 29(0,-22.4) 30(0,-23.2) 31(0,-24) 32(0,-24.8) 33(12.6,-24.8) 34(12.6,-24) 35(12.6,-23.2) 36(12.6,-22.4) 37(12.6,-21.6) 38(12.6,-20.8) 39(12.6,-20) 40(12.6,-19.2) 41(12.6,-18.4) 42(12.6,-17.6) 43(12.6,-16.8) 44(12.6,-16) 45(12.6,-15.2) 46(12.6,-14.4) 47(12.6,-13.6) 48(12.6,-12.8) 49(12.6,-12) 50(12.6,-11.2) 51(12.6,-10.4) 52(12.6,-9.6) 53(12.6,-8.8) 54(12.6,-8) 55(12.6,-7.2) 56(12.6,-6.4) 57(12.6,-5.6) 58(12.6,-4.8) 59(12.6,-4) 60(12.6,-3.2) 61(12.6,-2.4) 62(12.6,-1.6) 63(12.6,-0.8) 64(12.6,0)
  silkscreen extent 1.3,-25.4 11.3,0.6
TSSOP48 [mm]
  oval 0.3x1.9 smd: 1(0,0) 2(0.5,0) 3(1,0) 4(1.5,0) 5(2,0) 6(2.5,0) 7(3,0) 8(3.5,0) 9(4,0) 10(4.5,0) 11(5,0) 12(5.5,0) 13(6,0) 14(6.5,0) 15(7,0) 16(7.5,0) 17(8,0) 18(8.5,0) 19(9,0) 20(9.5,0) 21(10,0) 22(10.5,0) 23(11,0) 24(11.5,0) 25(11.5,7.4) 26(11,7.4) 27(10.5,7.4) 28(10,7.4) 29(9.5,7.4) 30(9,7.4) 31(8.5,7.4) 32(8,7.4) 33(7.5,7.4) 34(7,7.4) 35(6.5,7.4) 36(6,7.4) 37(5.5,7.4) 38(5,7.4) 39(4.5,7.4) 40(4,7.4) 41(3.5,7.4) 42(3,7.4) 43(2.5,7.4) 44(2,7.4) 45(1.5,7.4) 46(1,7.4) 47(0.5,7.4) 48(0,7.4)
  silkscreen extent -0.4,1.4 11.9,6.1

## Part data
C1 C98 C99: "Polarized Capacitor"
C2 C3 C4 C5 C6 C7 C8 C9 C10 C11 C12 C13 C14 C15 C16 C17 C18 C19 C20 C21 C22 C23 C26 C27 C28 C29 C30 C31 C32 C33 C34 C35 C36 C37 C38 C39 C40 C41 C42 C43 C44 C45 C46 C47 C48 C49 C50 C51 C52 C53 C55 C56 C57 C58 C59 C60 C61 C62 C64 C66 C67 C68 C69 C70 C71 C72 C73 C74 C75 C76 C77 C78 C79 C80 C81 C82 C83 C84 C85 C86 C87 C88 C89 C90 C91 C92 C93 C94 C95 C96 C97: "Capacitor"
C24 C25 C54 C63 C65 C100: "Polarized Capacitor (Surface Mount)"
D1 D2 D3: "Schottky Diode"
J1: library part CON10
J2 J3: "22-Pin Edge Connector"
J4: "Elpac Compatible Power Supply Connector"
J5: "BNC Connector"
JP1 JP2 JP3 JP4 JP5: library part JUMPER3SM
P1: "Header, 2-Pin"
P2: "Header, 5-Pin"
R1 R2 R3 R4 R5 R6 R7 R8 R9 R10 R11 R12 R13 R14 R15 R16 R17 R18 R19 R20 R21 R22 R23 R24 R25 R26 R27 R28 R29 R30 R31 R32 R33 R34 R35 R36 R37 R38 R39 R40 R41 R42 R43 R44 R46 R47 R48 R49 R50 R51 R52 R53 R54 R55 R56 R57 R58 R59 R60 R61 R62 R63 R64 R65 R66 R67 R68 R69 R70 R71 R72 R73 R74 R75 R76: "Resistor"
S1: "SPDT Subminiature Toggle Switch, Right Angle Mounting, Vertical Actuation"
SW1 SW2: "Rotary Encoder with Built-In Push Button"
U1 U3 U6 U7 U8 U9 U10: "16-Bit Bus Transceiver"
U2: "Cyclone III EP3C-25 FPGA PQFP240"
U4: library part EPCS1, "Altera Serial Configuration Device"
U5: library part MAX705, "Maxim uP Supervisory Circuit"
U11: library part TLV1117-25_KVU_3, "Imported"
U12: library part TLV1117_KCS_3, "Imported"
U13: library part TLV1117-33_KVU_3, "Imported"
U14: "512KBit x 8 ROM"
U15: "1 M SRAM (128-kword x 8-bit)"
U16: library part ADS830_DBQ_20, "Imported"
U17: library part THS4042_D_8, "Imported"
U18: library part TSC2003_PW_16, "Imported"
U19: library part LMR62014_DBV_5, "Imported"
U20 U21: "262,144-Word x 16-Bit Multiport DRAM"
W1: "Jumper Wire"
X1: "Oscillator with Active High Output Enable"

## Free pads (board coordinates)
  round 80 hole 62: 0(1824,4750) 1(1950,4876) 2(1825,4876) 3(3487,3923) 4(3353,3929) 5(3353,3833) -12(1949,4751)
  round 65 hole 42: 0(7660,1490) 0(7660,1590) 0(7660,1690) 0(7660,1790) 0(7660,1890) 0(7660,1990) 0(7660,2090) 0(7660,2190) 0(7660,2290) 0(7660,2390) 0(7660,2490) 0(7660,2590) 0(7660,2690) 0(7660,2790) 0(7660,2890) 0(7660,2990) 0(7660,3090) 0(7660,3190) 0(7660,3290) 0(7660,3390) 0(7660,3490) 0(7660,3590) 0(7660,3690) 0(7660,3790) 0(7660,3890) 0(7660,3990) 0(7660,4090) 0(7760,1490) 0(7760,1590) 0(7760,1690) 0(7760,1790) 0(7760,1890) 0(7760,1990) 0(7760,2090) 0(7760,2190) 0(7760,2290) 0(7760,2390) 0(7760,2490) 0(7760,2590) 0(7760,2690) 0(7760,2790) 0(7760,2890) 0(7760,2990) 0(7760,3090) 0(7760,3190) 0(7760,3290) 0(7760,3390) 0(7760,3490) 0(7760,3590) 0(7760,3690) 0(7760,3790) 0(7760,3890) 0(7760,3990) 0(7760,4090) 0(7860,1490) 0(7860,1590) 0(7860,1690) 0(7860,1790) 0(7860,1890) 0(7860,1990) 0(7860,2090) 0(7860,2190) 0(7860,2290) 0(7860,2390) 0(7860,2490) 0(7860,2590) 0(7860,2690) 0(7860,2790) 0(7860,2890) 0(7860,2990) 0(7860,3090) 0(7860,3190) 0(7860,3290) 0(7860,3390) 0(7860,3490) 0(7860,3590) 0(7860,3690) 0(7860,3790) 0(7860,3890) 0(7860,3990) 0(7860,4090) 0(7960,1490) 0(7960,1590) 0(7960,1690) 0(7960,1790) 0(7960,1890) 0(7960,1990) 0(7960,2090) 0(7960,2190) 0(7960,2290) 0(7960,2390) 0(7960,2490) 0(7960,2590) 0(7960,2690) 0(7960,2790) 0(7960,2890) 0(7960,2990) 0(7960,3090) 0(7960,3190) 0(7960,3290) 0(7960,3390) 0(7960,3490) 0(7960,3590) 0(7960,3690) 0(7960,3790) 0(7960,3890) 0(7960,3990) 0(7960,4090) 0(8060,1490) 0(8060,1590) 0(8060,1690) 0(8060,1790) 0(8060,1890) 0(8060,1990) 0(8060,2090) 0(8060,2190) 0(8060,2290) 0(8060,2390) 0(8060,2490) 0(8060,2590) 0(8060,2690) 0(8060,2790) 0(8060,2890) 0(8060,2990) 0(8060,3090) 0(8060,3190) 0(8060,3290) 0(8060,3390) 0(8060,3490) 0(8060,3590) 0(8060,3690) 0(8060,3790) 0(8060,3890) 0(8060,3990) 0(8060,4090) 0(8160,1490) 0(8160,1590) 0(8160,1690) 0(8160,1790) 0(8160,1890) 0(8160,1990) 0(8160,2090) 0(8160,2190) 0(8160,2290) 0(8160,2390) 0(8160,2490) 0(8160,2590) 0(8160,2690) 0(8160,2790) 0(8160,2890) 0(8160,2990) 0(8160,3090) 0(8160,3190) 0(8160,3290) 0(8160,3390) 0(8160,3490) 0(8160,3590) 0(8160,3690) 0(8160,3790) 0(8160,3890) 0(8160,3990) 0(8160,4090) 0(8260,1490) 0(8260,1590) 0(8260,1690) 0(8260,1790) 0(8260,1890) 0(8260,1990) 0(8260,2090) 0(8260,2190) 0(8260,2290) 0(8260,2390) 0(8260,2490) 0(8260,2590) 0(8260,2690) 0(8260,2790) 0(8260,2890) 0(8260,2990) 0(8260,3090) 0(8260,3190) 0(8260,3290) 0(8260,3390) 0(8260,3490) 0(8260,3590) 0(8260,3690) 0(8260,3790) 0(8260,3890) 0(8260,3990) 0(8260,4090) 0(8360,1490) 0(8360,1590) 0(8360,1690) 0(8360,1790) 0(8360,1890) 0(8360,1990) 0(8360,2090) 0(8360,2190) 0(8360,2290) 0(8360,2390) 0(8360,2490) 0(8360,2590) 0(8360,2690) 0(8360,2790) 0(8360,2890) 0(8360,2990) 0(8360,3090) 0(8360,3190) 0(8360,3290) 0(8360,3390) 0(8360,3490) 0(8360,3590) 0(8360,3690) 0(8360,3790) 0(8360,3890) 0(8360,3990) 0(8360,4090) 0(8460,1490) 0(8460,1590) 0(8460,1690) 0(8460,1790) 0(8460,1890) 0(8460,1990) 0(8460,2090) 0(8460,2190) 0(8460,2290) 0(8460,2390) 0(8460,2490) 0(8460,2590) 0(8460,2690) 0(8460,2790) 0(8460,2890) 0(8460,2990) 0(8460,3090) 0(8460,3190) 0(8460,3290) 0(8460,3390) 0(8460,3490) 0(8460,3590) 0(8460,3690) 0(8460,3790) 0(8460,3890) 0(8460,3990) 0(8460,4090) 0(8560,1490) 0(8560,1590) 0(8560,1690) 0(8560,1790) 0(8560,1890) 0(8560,1990) 0(8560,2090) 0(8560,2190) 0(8560,2290) 0(8560,2390) 0(8560,2490) 0(8560,2590) 0(8560,2690) 0(8560,2790) 0(8560,2890) 0(8560,2990) 0(8560,3090) 0(8560,3190) 0(8560,3290) 0(8560,3390) 0(8560,3490) 0(8560,3590) 0(8560,3690) 0(8560,3790) 0(8560,3890) 0(8560,3990) 0(8560,4090)
  round 140 hole 125: 1(6215,4776) 2(1935,2115) 3(1392,3875) 4(8525,1165)
  round 30 smd far side: EndPad(6530,3210) StartPad(6270,2562.44) StartPad(6530,3210) StartPad(7005,3841.54)

## Via types
v1: diameter 25, hole 15, Top Layer to Bottom Layer, 359 vias

## Nets (pads, with @x,y where several pads share a name; then routed paths per layer and width w, separated by ;. In a path a pad name is that pad's centre, name@x,y a point inside that pad or via, vN(x,y) a via of type N, cw(c..) or ccw(c..) an arc to the next point about the centre after c; other vN are vias at no path point)
A0: U8.47 U14.12 U15.31 | length 4023
  Top Layer w8: U8.47@4534.69,4172.34 4534.69,4283.69 4801,4550 6415,4550 6520,4655 7085,4655 U15.31@7130,4610 7739.09,4610 7803.09,4546 7804.91,4546 7826,4524.91 7826,4523.09 7875.09,4474 8126,4474 U14.12@8190,4410
A1: U8.46 U14.11 U15.2 | length 4051.7
  Top Layer w8: U8.46@4554.37,4172.34 4554.37,4282.16 4806.08,4533.87 6453.87,4533.87 U15.2@6530,4610 7079.09,4610 7115.09,4574 7654,4574 7769,4459 8119.79,4459 8154,4424.79 8154,4374 8190,4338 U14.11@8190,4310
A2: U8.44 U14.10 U15.3 | length 3853.3
  Top Layer w8: U8.44@4593.74,4172.34 4593.74,4300.31 4812.25,4518.83 6521.17,4518.83 U15.3@6530,4510 7079.09,4510 7115.09,4546 7660.79,4546 7754,4452.79 7754,4395.09 7775.09,4374 8004.91,4374 8005.91,4375 8055,4375 U14.10@8090,4410
A3: U8.43 U14.9 U15.4 | length 3798.1
  Top Layer w8: U8.43@4613.43,4172.34 4613.43,4298.79 4818.47,4503.83 6436.17,4503.83 U15.4@6530,4410 7079.09,4410 7115.09,4446 7681.88,4446 7768.88,4359 8041,4359 U14.9@8090,4310
A4: U8.41 U14.8 U15.28 | length 3668.5
  Top Layer w8: U8.41@4652.8,4172.34 4652.8,4316.94 4824.68,4488.83 6400.26,4488.83 6543.09,4346 7094,4346 U15.28@7130,4310
  Bottom Layer w8: U15.28@7130,4310 7826,4310 7886,4370 7950,4370 U14.8@7990,4410
A5: U8.40 U14.7 U15.5 | length 3628
  Top Layer w8: U8.40@4672.48,4172.34 4672.48,4315.41 4830.89,4473.83 6366.17,4473.83 U15.5@6530,4310 7079.09,4310 7115.09,4274 7961,4274 7990,4303 U14.7@7990,4310
A6: U8.38 U14.6 U15.27 | length 3696.1
  Top Layer w8: U8.38@4711.85,4172.34 4711.85,4333.57 4837.11,4458.83 6330.26,4458.83 6515.09,4274 7066,4274 U15.27@7130,4210
  Bottom Layer w8: U15.27@7130,4210 7130,4259.09 7094,4295.09 7094,4324.91 7115.09,4346 7144.91,4346 7145.81,4345.11 7825.11,4345.11 U14.6@7890,4410
A7: U8.37 U14.5 U15.6 | length 3556.5
  Top Layer w8: U8.37@4731.53,4172.34 4731.53,4332.04 4843.32,4443.83 6296.17,4443.83 U15.6@6530,4210 v1(6879,4210)
  Bottom Layer w8: v1(6879,4210) 7079.09,4210 7115.09,4174 7144.91,4174 7166,4195.09 7166,4236 7225,4295 7832.21,4295 7847.21,4310 U14.5@7890,4310
A8: U8.36 U14.27 U15.26 | length 4764.2
  Top Layer w8: 4750,4210 4750,4329.29 4849.53,4428.83 6260.26,4428.83 6543.09,4146 7094,4146 U15.26@7130,4110
  Bottom Layer w8: v1(6385,4305) 6420,4340 6420,4728.79 6561.21,4870 7930,4870 U14.27@7990,4810
A9: U8.35 U14.26 U15.7 | length 4388.1
  Top Layer w8: U8.35@4770.9,4172.34 4770.9,4328.99 4855.75,4413.83 6226.17,4413.83 U15.7@6530,4110
  Bottom Layer w8: v1(6340,4300) 6405,4365 6405,4735 6555,4885 7965.91,4885 8026,4824.91 8026,4774 U14.26@8090,4710
A10: U8.33 U14.23 U15.25 | length 5083.7
  Top Layer w8: U8.33@4810.27,4172.34 4810.27,4347.14 4861.96,4398.83 6190.26,4398.83 6515.09,4074 7066,4074 U15.25@7130,4010
  Bottom Layer w8: v1(6275,4310) 6375,4410 6375,4747.43 6542.57,4915 8085,4915 U14.23@8190,4810
A11: U8.32 U14.25 U15.8 | length 4370.2
  Top Layer w8: U8.32@4829.96,4172.34 4829.96,4345.61 4867.35,4383 6157,4383 U15.8@6530,4010
  Bottom Layer w8: v1(6270,4270) 6275,4270 6275,4276.77 6390,4391.77 6390,4741.21 6548.79,4900 8000,4900 U14.25@8090,4810
A12: U8.30 U14.4 U15.9 | length 4117.7
  Top Layer w8: U8.30@4869.33,4172.34 4869.33,4291.95 4945.38,4368 6072,4368 U15.9@6530,3910
  Bottom Layer w8: U15.9@6530,3910 6861.21,3910 6925.21,3974 7144.91,3974 7181,4010.09 7181,4229.79 7225.21,4274 7904.91,4274 7926,4295.09 7926,4296.91 8003.09,4374 8004.91,4374 8026,4395.09 8026,4424.91 8004.91,4446 7846,4446 7810,4410 U14.4@7790,4410
A13: U8.29 U14.28 U15.23 | length 4994.9
  Top Layer w8: U8.29@4889.02,4172.34 4889.02,4286.63 4955.38,4353 6036.09,4353 6515.09,3874 7066,3874 U15.23@7130,3810
  Bottom Layer w8: U15.23@7130,3810 7130,3859.09 7211,3940.09 7211,4215 7237.25,4241.25 8072.16,4241.25 8126,4295.09 8126,4424.91 8074.91,4476 8037.42,4476 7946.28,4567.14 7946.28,4568.72 7941,4574 7775.09,4574 7745,4604.09 7745,4733.79 7781.21,4770 7930,4770 U14.28@7990,4710
A14: U8.27 U14.29 U15.10 | length 4624.3
  Top Layer w8: U8.27@4928.39,4172.34 4928.39,4268.39 4998,4338 6002,4338 U15.10@6530,3810
  Bottom Layer w8: U15.10@6530,3810 6534.31,3814.31 6786.73,3814.31 6931.43,3959 7151.12,3959 7196,4003.88 7196,4223.57 7231.43,4259 7989.91,4259 8041,4310.09 8041,4431.12 7927.12,4545 7926,4545 7912,4559 7768.88,4559 7730,4597.88 7730,4740 7800,4810 U14.29@7890,4810
A15: U8.26 U14.3 U15.11 | length 4736.6
  Top Layer w8: U8.26@4948.07,4172.34 4948.07,4245.69 5025.38,4323 5917,4323 U15.11@6530,3710
  Bottom Layer w8: U15.11@6530,3710 6496,3710 6453.71,3752.29 6453.71,4720.07 6573.03,4839.39 7549.39,4839.39 7700,4688.79 7700,4549.09 7775.09,4474 7804.91,4474 7840.91,4510 U14.3@7890,4510
A16: U9.47 U14.2 U15.12 | length 3656.4
  Top Layer w8: U9.47@5674.34,3526.32 5784.31,3526.32 5858,3600 6520,3600 U15.12@6530,3610
  Bottom Layer w8: U15.12@6530,3610 6438.71,3701.29 6438.71,4726.29 6567.43,4855 7555,4855 7715,4695 7715,4591.66 7790,4516.66 U14.2@7790,4510
A17: U9.46 U14.30 | length 3626.1
  Top Layer w8: U9.46@5674.34,3506.63 5926.63,3506.63 v1(5970,3550) ; v1(5970,4670) 5970,4917 6018,4965 7535,4965 U14.30@7790,4710
  Bottom Layer w8: v1(5970,3550) v1(5970,4670)
A18: U9.44 U14.1 | length 3818.4
  Top Layer w8: U9.44@5674.34,3467.26 5972.26,3467.26 v1(6005,3500) ; v1@6005,4675 6005,4920 6035,4950 7528.79,4950 7754,4724.79 7754,4695.09 7775.09,4674 7826,4674 U14.1@7890,4610
  Bottom Layer w8: v1@6002.5,3497.5 v1(6005,3500) v1(6005,4670)
A19: U9.43
ACLK: U7.37 U16.10 | length 2980.8
  Top Layer w8: U16.10@2452.5,2689.5 2487,2655 v1(2520,2655) ; v1@3882.5,1592.5 3922.47,1632.46 U7.37@3922.47,1722.66
  Bottom Layer w8: v1(2520,2655) 2600,2655 2611,2644 2611,2609.23 2595.77,2594 2539,2594 2240,2295 2240,1972.78 2542.57,1670.21 2726.9,1670.21 2798.62,1598.5 3871.5,1598.5 v1(3880,1590)